# EAGLE board Imprimir (EAGLE 7.6.0)
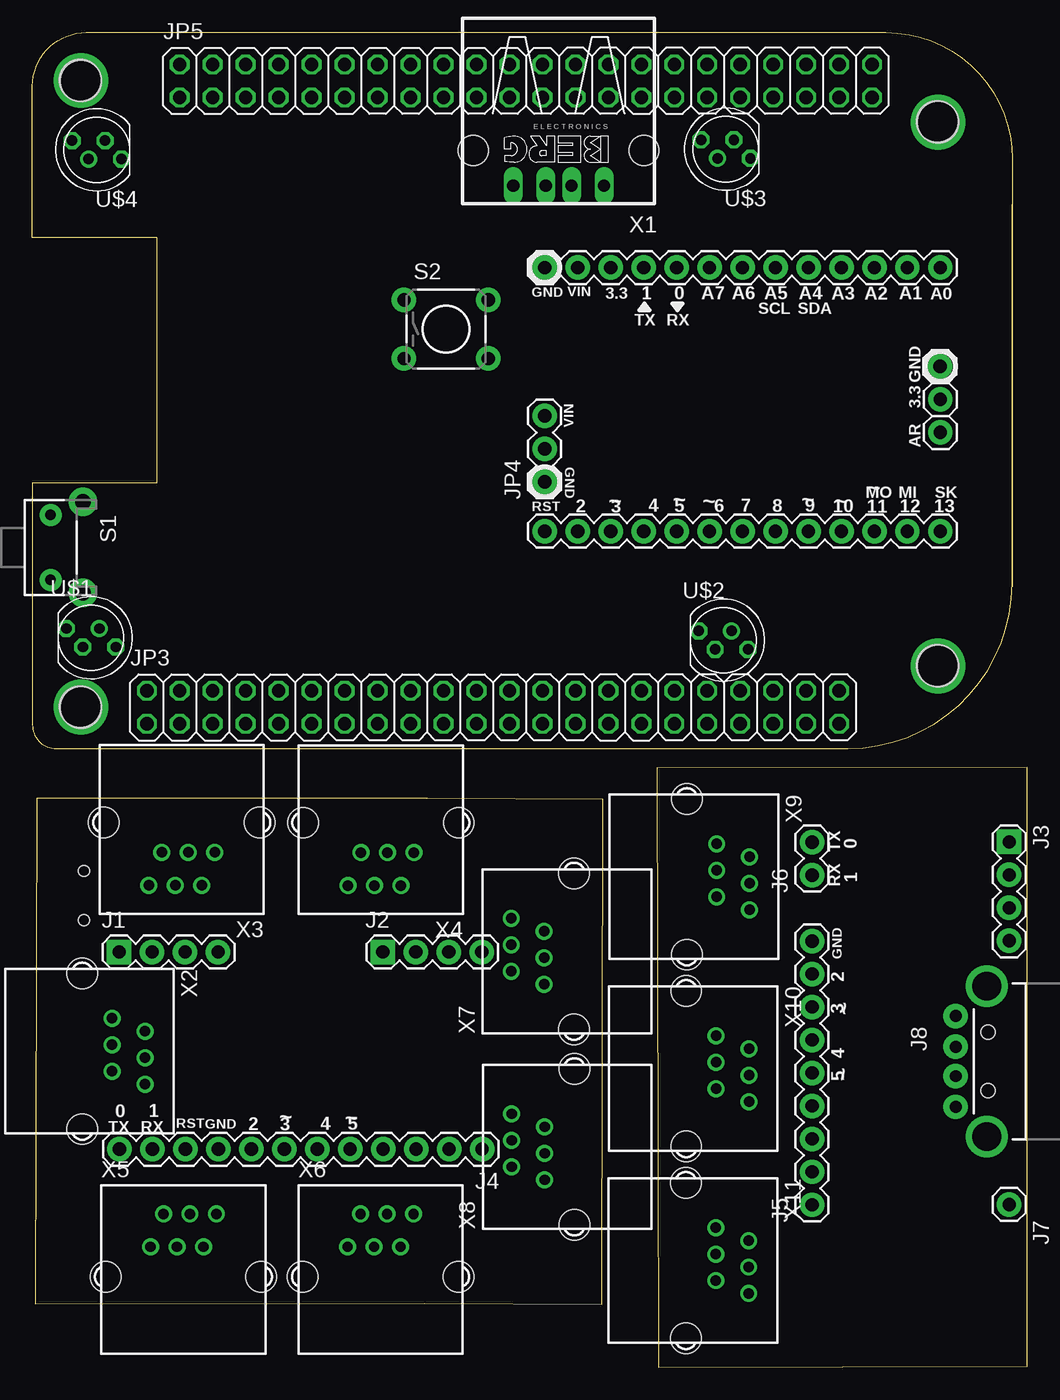
[diagram p0: board, top side]
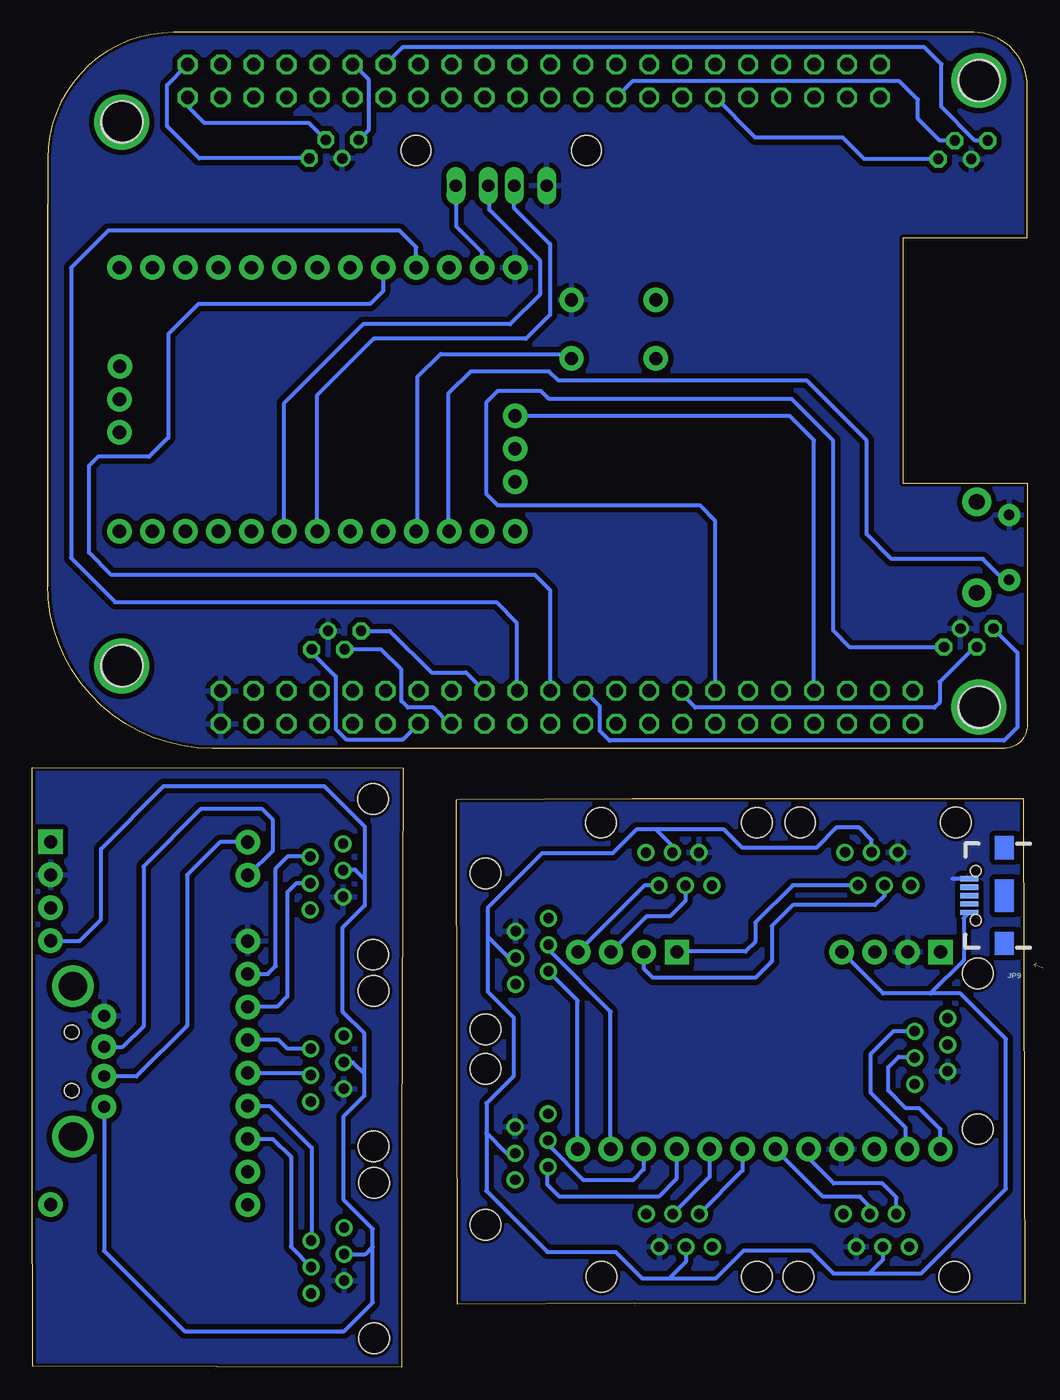
[diagram p1: board, bottom side, seen from below]

Size 76.66 x 102.82 mm. Coordinates in mm from the lower left corner, seen from the top.
Outline: 75.49,89.56 75.49,60.35 arc-90 62.81,47.65 1.83,47.65 arc-90 0,49.48
Outline: 75.49,60.15 75.49,93.09 arc90 65.76,102.82 4.14,102.82 arc90 0,98.68 0,87.02 9.58,87.02 9.58,68.1 0,68.1 0,49.48
Outline: 0,49.48 0,49.45
Outline: 0.2,4.88 30.23,4.93 43.89,4.83 43.97,43.71 30.45,43.79 0.33,43.81 0.2,4.88
Outline: 48.11,46.15 48.21,16.92 48.23,0 76.63,0.08 76.66,15.82 76.66,46.2 48.11,46.15
Copper layers (1*16): Top 0.035mm / dielectric 1.5mm / Bottom 0.035mm
Design rules "ITEADstudio_DRC *": minimum track width 6mil, minimum drill 12mil, track to track 16mil, track to pad 12mil, pad to pad 6mil, via to via 6mil, smd to smd 0mil, copper to edge 10mil, drill to drill 10mil, minimum pad ring 10mil, minimum via ring 6mil, stop-mask expansion 2mil, vias tented up to drill 100mil, thermal gap 15mil
Net classes: 1 power: width 0.381 mm, clearance 0.254 mm
Holes 3.2 mm at 3.68,99.14 3.68,50.88 69.72,54.05 69.72,95.96 3.73,99.09 3.73,50.83 69.77,54 69.77,95.91 3.73,99.09 3.73,50.83 69.77,54 69.77,95.91

## Footprints (pad centres in the part's own frame; a part is rotated, then mirrored left to right if it is on the bottom)
1X01 = drill 1.016 pad 1.88: 1 0,0
1X13 = drill 1.016 pad 1.88: 1 0,0; 2 2.54,0; 3 5.08,0; 4 7.62,0; 5 10.16,0; 6 12.7,0; 7 15.24,0; 8 17.78,0; 9 20.32,0; 10 22.86,0; 11 25.4,0; 12 27.94,0; 13 30.48,0
1X04 = drill 1.016 pad 1.88 square: 1 0,0 | drill 1.016 pad 1.88: 2 2.54,0; 3 5.08,0; 4 7.62,0
1X12 = drill 1.016 pad 1.88: 1 0,0; 2 2.54,0; 3 5.08,0; 4 7.62,0; 5 10.16,0; 6 12.7,0; 7 15.24,0; 8 17.78,0; 9 20.32,0; 10 22.86,0; 11 25.4,0; 12 27.94,0
1X09 = drill 1.016 pad 1.88: 1 0,0; 2 2.54,0; 3 5.08,0; 4 7.62,0; 5 10.16,0; 6 12.7,0; 7 15.24,0; 8 17.78,0; 9 20.32,0
1X02 = drill 1.016 pad 1.88: 1 0,0; 2 2.54,0
USB-A-H = drill 0.914 pad 1.88: D+ 2.4,1.127; D- 2.4,-1.127; GND 2.4,3.5; VBUS 2.4,-3.5 | drill 2.2: GND2 0,-5.8; GND3 0,5.8 | hole 1.1: -0.1,2.25; -0.1,-2.25
2X22 = drill 1.016 octagon: 1 -25.4,-1.27; 2 -25.4,1.27; 3 -22.86,-1.27; 4 -22.86,1.27; 5 -20.32,-1.27; 6 -20.32,1.27; 7 -17.78,-1.27; 8 -17.78,1.27; 9 -15.24,-1.27; 10 -15.24,1.27; 11 -12.7,-1.27; 12 -12.7,1.27; 13 -10.16,-1.27; 14 -10.16,1.27; 15 -7.62,-1.27; 16 -7.62,1.27; 17 -5.08,-1.27; 18 -5.08,1.27; 19 -2.54,-1.27; 20 -2.54,1.27; 21 0,-1.27; 22 0,1.27; 23 2.54,-1.27; 24 2.54,1.27; 25 5.08,-1.27; 26 5.08,1.27; 27 7.62,-1.27; 28 7.62,1.27; 29 10.16,-1.27; 30 10.16,1.27; 31 12.7,-1.27; 32 12.7,1.27; 33 15.24,-1.27; 34 15.24,1.27; 35 17.78,-1.27; 36 17.78,1.27; 37 20.32,-1.27; 38 20.32,1.27; 39 22.86,-1.27; 40 22.86,1.27; 41 25.4,-1.27; 42 25.4,1.27; 43 27.94,-1.27; 44 27.94,1.27
1X03 = drill 1.016 pad 1.88: 1 0,0; 2 2.54,0; 3 5.08,0
USB-AB-MICRO-SMD_V03 = smd 1.4 x 0.4: D+1 2.7,0; D-1 2.7,0.65; GND1 2.7,-1.3; ID1 2.7,-0.65; VBUS1 2.7,1.3 | hole 0.85: 2.2,1.9; 2.2,-1.9
TACTILE-PTH-SIDEEZ = drill 0.8 pad 1.7: 1 -2.5,0; 2 2.5,0 | drill 1.2 pad 2.2: ANCHOR1 -3.5,2.5; ANCHOR2 3.5,2.5
TACTILE-PTH = drill 1.016 pad 1.88: 1 -3.251,2.261; 2 3.251,2.261; 3 -3.251,-2.261; 4 3.251,-2.261
LED5MMRGB = drill 0.8 pad 0.813 octagon: P$1 -1.905,0.714; P$2 -0.635,-0.714; P$4 1.905,-0.714 | drill 0.8 pad 0.813: P$3 0.635,0.714
PN87520 = drill 0.95 long: 1 -3.5,2.71; 2 -1,2.71; 3 1,2.71; 4 3.5,2.71 | hole 2.3: -6.57,0; 6.57,0
YH-55-10 = drill 0.8 pad 1.3: 1 -2.54,2.3; 2 -1.54,4.84; 3 -0.5,2.3; 4 0.5,4.84; 5 1.54,2.3; 6 2.54,4.84 | hole 2.36: -6,0; 6,0

## Placement (x,y rotation side)
+  M01PTH  [1X01]  69.95,74.55 270 top
ANALOGSIDE  M13  [1X13]  69.95,84.71 180 top
DIGITALSIDE  M13  [1X13]  69.95,64.39 180 top
J1  [1X04]  6.68,31.98 0 top
J2  [1X04]  27,31.98 0 top
J3  [1X04]  75.26,40.46 270 top
J4  [1X12]  34.65,16.79 180 top
J5  [1X09]  60.07,12.5 90 top
J6  [1X02]  60.07,37.9 90 top
J7  [1X01]  75.26,12.52 270 top
J8  USB-A-H  [USB-A-H]  73.53,23.55 180 top
JP1  M01PTH  [1X01]  69.95,72.01 0 top
JP2  M01PTH  [1X01]  69.93,77.09 0 top
JP3  [2X22]  34.21,50.83 0 top
JP4  [1X03]  39.47,68.2 90 top
JP5  [2X22]  36.75,99.09 0 top
JP9  Micro USB  [USB-AB-MICRO-SMD_V03]  1.78,36.32 180 bottom
S1  SWITCH-MOMENTARY-2SIDE_EZ  [TACTILE-PTH-SIDEEZ]  1.4,63.14 270 top
S2  [TACTILE-PTH]  31.88,79.96 0 top
U$1  5MMRGBLED  [LED5MMRGB]  4.52,56.18 0 top
U$2  5MMRGBLED  [LED5MMRGB]  53.24,56.01 0 top
U$3  5MMRGBLED  [LED5MMRGB]  53.42,93.83 180 top
U$4  5MMRGBLED  [LED5MMRGB]  4.95,93.78 180 top
X1  [PN87520]  40.54,93.73 180 top
X2  YH-55-10  [YH-55-10]  3.84,24.33 270 top
X3  YH-55-10  [YH-55-10]  11.51,41.96 180 top
X4  YH-55-10  [YH-55-10]  26.85,41.94 180 top
X5  YH-55-10  [YH-55-10]  11.63,6.96 0 top
X6  YH-55-10  [YH-55-10]  26.82,6.96 0 top
X7  YH-55-10  [YH-55-10]  41.73,32.03 90 top
X8  YH-55-10  [YH-55-10]  41.76,16.97 90 top
X9  YH-55-10  [YH-55-10]  50.42,37.77 270 top
X10  YH-55-10  [YH-55-10]  50.37,22.99 270 top
X11  YH-55-10  [YH-55-10]  50.34,8.2 270 top

## Library data of the parts
+ ANALOGSIDE DIGITALSIDE J4-J7 JP1 JP2 JP4 = SparkFun-Connectors
J1-J3 = SparkFun-Connectors; PROD_ID: CONN-09696
J8 = SparkFun-Connectors; PROD_ID: CONN-08367
JP3 JP5 = pinhead
JP9 = SparkFun-Connectors; PROD_ID: CONN-11794
S1 = SparkFun-Electromechanical
S2 = SparkFun-Retired
U$1-U$4 = led_rgb
X1 = con-berg; OC_FARNELL: unknown; OC_NEWARK: unknown
X2-X11 = con-wenzhou-yihua; OC_FARNELL: unknown; OC_NEWARK: unknown

## Nets
AGND [power]: JP4.1
AREF: JP1.1
GND [power]: ANALOGSIDE.13 JP3.43 JP3.44 S1.1 S2.2 U$1.P$3 U$2.P$3 U$3.P$3 U$4.P$3 X1.4
GND1 [power]: J1.2 J4.9 JP9.GND1 X2.5 X3.5 X4.5 X5.5 X6.5 X7.5 X8.5
GND2 [power]: J3.2 J5.9 J8.VBUS X9.5 X10.5 X11.5
N$1: DIGITALSIDE.10 S2.4
N$2: ANALOGSIDE.9 JP3.24
N$3: DIGITALSIDE.9
N$4: ANALOGSIDE.11
N$5: JP3.14 U$1.P$4
N$6: ANALOGSIDE.8
N$7: J4.12 X2.4
N$8: JP3.16 U$1.P$2
N$9: DIGITALSIDE.8
N$10: DIGITALSIDE.11 S1.2
N$11: JP3.22 U$1.P$1
N$12: JP3.28 U$2.P$1
N$13: JP3.29 U$2.P$2
N$14: JP3.31 U$2.P$4
N$15: JP5.11 U$4.P$1
N$16: JP5.17 U$4.P$2
N$17: JP5.32 U$4.P$4
N$19: JP5.43 U$3.P$2
N$20: JP5.44 U$3.P$1
N$21: JP5.34 U$3.P$4
N$22: ANALOGSIDE.10 JP3.26
N$23: DIGITALSIDE.7 X1.3
N$24: ANALOGSIDE.12 X1.1
N$25: DIGITALSIDE.6 X1.2
N$29: J4.11 X2.2
N$30: J4.10
N$31: J4.7 X5.4
N$32: J4.8 X5.2
N$33: J4.5 X6.4
N$34: J4.6 X6.2
N$35: J4.3 X8.4
N$36: J4.4 X8.2
N$37: J4.2 X7.4
N$38: J4.1 X7.2
N$39: J2.4 X4.2
N$40: J2.3 X4.4
N$41: J2.2 X3.4
N$42: J2.1 X3.2
N$43: J5.7 X9.4
N$44: J5.8 X9.2
N$45: J5.5 X10.4
N$46: J5.6 X10.2
N$47: J5.3 X11.4
N$48: J5.4 X11.2
N$49: J5.2
N$50: J5.1
N$51: J7.1
N$52: J6.2 J8.D+
N$53: J6.1 J8.D-
VCC: JP3.8 JP4.3
VIN: J1.4 JP9.VBUS1 X3.3 X4.3 X5.3 X6.3 X7.3 X8.3
VIN1: J3.4 J8.GND X9.3 X10.3 X11.3

## Tracks (layer width: path | path; a pad name or v marks a point on that pad's centre or on a via)
AGND1
  pour Bottom: 0.43,43.76 43.87,43.69 43.99,4.83 0.18,4.85 0.28,33.96
AGND2
  pour Bottom: 76.68,0.48 48.11,0.25 48.13,46.28 76.5,46.18
GND
  pour Bottom: -0.46,102.77 74.93,102.54 75.39,47.24 -0.25,47.47
GND1
  Bottom 0.305: JP9.GND1 5.77,37.62
  pour Bottom: 0.33,43.71 43.87,43.69 43.99,4.85 0.13,4.9
GND2
  pour Bottom: 76.5,46.18 76.61,0.43 48.16,0.13 48.08,46.2
N$1
  Bottom 0.305: DIGITALSIDE.10 47.02,64.47 47.02,76.25 45.21,78.05 35.48,78.05 S2.4
N$2
  Bottom 0.305: ANALOGSIDE.9 49.63,82.91 50.65,81.89 63.88,81.89 66.19,79.58 66.19,71.6 67.67,70.13 71.6,70.13 72.29,69.44 72.29,62.74 70.59,61.04 37.95,61.04 36.75,59.84 JP3.24
N$5
  Bottom 0.305: U$1.P$4 6.45,55.45 13.67,55.45 14.96,56.74 14.96,71.37 18.16,74.57 36.86,74.57 37.47,75.18 40.82,75.18 41.71,74.29 41.71,67.28 40.82,66.4 25.25,66.4 24.08,65.23 24.08,52.12 JP3.14
N$7
  Bottom 0.305: J4.12 6.71,18.31 8.33,19.94 9.35,19.94 10.72,21.31 10.72,23.09 9.91,23.9 8.74,23.9 X2.4
N$8
  Bottom 0.305: U$1.P$2 4.07,55.47 6.76,52.78 6.76,51.21 7.16,50.8 25.58,50.8 26.59,51.82 JP3.16
N$10
  Bottom 0.305: S1.2 1.82,60.64 3.43,62.26 10.46,62.26 12.37,64.16 12.37,71.37 16.99,76 36.14,76 36.86,76.71 42.9,76.71 44.63,74.98 44.63,64.47 DIGITALSIDE.11
N$11
  Bottom 0.305: U$1.P$1 0.76,55.04 0.76,49.28 1.78,48.26 32.18,48.26 32.94,49.02 32.94,50.9 34.14,52.1 JP3.22
N$12
  Bottom 0.305: U$2.P$1 49.13,56.72 45.92,53.52 43.26,53.52 JP3.28
N$13
  Bottom 0.305: 44.53,49.56 45.77,50.8 47.73,50.8 48.23,51.31 48.23,53.72 49.81,55.3 U$2.P$2
  Bottom 0.406: JP3.29 44.53,49.56 | U$2.P$2
N$14
  Bottom 0.305: 55.14,55.07 53.29,53.21 53.29,49.15 52.5,48.36 48.11,48.36 JP3.31
  Bottom 0.406: U$2.P$4 55.14,55.07
N$15
  Bottom 0.305: U$4.P$1 12.57,93.06 14.22,94.72 20.96,94.72 JP5.11
N$16
  Bottom 0.305: U$4.P$2 6.76,94.49 8.43,96.16 8.43,97.64 9.86,99.06 30.43,99.06 JP5.17
N$17
  Bottom 0.305: U$4.P$4 4.04,94.49 6.63,97.08 6.63,100.38 7.92,101.68 48.13,101.68 JP5.32
N$18  (via drill 3.2)
  other vias: 3.73,99.11
N$19
  Bottom 0.305: U$3.P$2 55.34,95.83 63.4,95.83 64.69,97.13 JP5.43
N$20
  Bottom 0.305: U$3.P$1 63.8,93.11 66.29,95.61 66.29,98.76 JP5.44
N$21
  Bottom 0.305: U$3.P$4 50.72,95.33 50.72,99.16 51.92,100.36
  Bottom 0.406: 51.92,100.36 JP5.34
N$22
  Bottom 0.305: ANALOGSIDE.10 47.09,86.26 48.39,87.55 70.82,87.55 73.69,84.68 73.69,62.33 70.28,58.93 40.92,58.93 39.34,57.35 39.34,52.15 JP3.26
N$23
  Bottom 0.305: DIGITALSIDE.7 54.71,74.88 50.37,79.22 38.63,79.22 36.78,81.08 36.78,86.51 39.55,89.28 X1.3
N$24
  Bottom 0.305: ANALOGSIDE.12 42.01,85.88 43.99,87.86 43.99,90.97 X1.1
N$25
  Bottom 0.305: DIGITALSIDE.6 57.25,74.27 51.18,80.34 39.85,80.34 37.57,82.63 37.57,85.27 41.45,89.15 41.45,90.35 41.4,90.4 41.4,90.88 X1.2
N$26  (via drill 3.2)
  other vias: 3.73,50.85
N$27  (via drill 3.2)
  other vias: 69.77,54
N$28  (via drill 3.2)
  other vias: 69.77,95.91
N$29
  Bottom 0.305: X2.2 10.32,25.87 12.09,24.1 12.09,21.16 9.4,18.47 9.4,16.94 J4.11
N$31
  Bottom 0.305: X5.4 12.13,12.36 12.9,13.13 15.75,13.13 J4.7
N$32
  Bottom 0.305: X5.2 10.09,13.06 11.18,14.15 14.91,14.15 17.02,16.26 17.02,16.64 J4.8
N$33
  Bottom 0.305: J4.5 24.49,14.64 X6.4
N$34
  Bottom 0.305: J4.6 21.95,15.14 X6.2
N$35
  Bottom 0.305: J4.3 29.57,15.21 30.38,14.4 34.19,14.4 36.75,16.97 36.75,17.3 X8.4
N$36
  Bottom 0.305: J4.4 27.03,14.5 28.4,13.13 36.07,13.13 36.98,14.05 36.98,15.36 X8.2
N$37
  Bottom 0.305: J4.2 32.11,27.38 36.75,32.03 36.75,32.39 X7.4
N$38
  Bottom 0.305: J4.1 34.65,28.24 X7.2
N$39
  Bottom 0.305: X4.2 29.5,37.1 J2.4
N$40
  Bottom 0.305: X4.4 26.35,35.91 27.53,34.72 29.34,34.72 J2.3
N$41
  Bottom 0.305: X3.4 11.01,36.31 11.73,35.59 18.08,35.59 19.69,33.99 19.69,31.27 20.96,30 28.85,30 29.54,30.68 J2.2
N$42
  Bottom 0.305: X3.2 18.07,37.12 20.96,34.24 20.96,32.77 21.72,32 26.97,32 J2.1
N$43
  Bottom 0.305: X9.4 56.33,37.27 57.02,36.58 57.02,28.55 57.81,27.76 60.05,27.76 J5.7
N$44
  Bottom 0.305: J5.8 58.52,30.28 57.91,30.89 57.91,38.43 56.97,39.37 55.32,39.37 X9.2
N$45
  Bottom 0.305: J5.5 55.38,22.66 X10.4
N$46
  Bottom 0.305: X10.2 57.01,24.53 57.71,25.22 60.05,25.22 J5.6
N$47
  Bottom 0.305: J5.3 58.14,17.58 56.74,16.18 56.74,9.26 X11.4
N$48
  Bottom 0.305: J5.4 58.37,20.12 55.14,16.89 55.14,9.78 X11.2
N$52
  Bottom 0.305: J6.2 62.2,40.44 64.74,37.9 64.74,26.29 68.66,22.38 68.7,22.42 J8.D+
N$53
  Bottom 0.305: J6.1 60.02,37.9 58.12,39.8 58.12,42.14 58.95,42.98 63.68,42.98 68.1,38.56 68.1,26.26 69.69,24.67 J8.D-
VCC
  Bottom 0.305: 39.45,73.25 JP4.3 18.31,73.28 16.43,71.4 JP3.8
VIN
  Bottom 0.305: X3.3 12.01,40.61 12.95,41.55 14.71,41.55 16.26,40 21.97,40 23.37,41.4 28.6,41.4 | 28.6,41.4 30.12,41.4 31.95,39.57 37.39,39.57 41.58,35.38 41.58,33.17 | 41.58,33.17 41.58,28.93 39.6,26.95 39.6,22.4 41.68,20.32 41.68,18.03 | 41.68,18.03 41.68,13.56 36.98,8.86 31.72,8.86 29.69,6.83 27.58,6.83 | 27.58,6.83 24,6.83 21.84,8.99 16.71,8.99 14.94,7.21 12.19,7.21 | 12.19,7.21 8.18,7.21 1.65,13.74 1.65,25.27 5.16,28.78 7.47,28.78 | 7.47,28.78 11.1,28.78 J1.4 | X5.3 11.13,8.27 12.19,7.21 | X6.3 26.32,8.09 27.58,6.83 | X8.3 40.11,16.47 41.68,18.03 | X7.3 39.94,31.53 41.58,33.17 | X4.3 27.35,40.15 28.6,41.4 | JP9.VBUS1 4.9,34.6 4.9,31.34 7.47,28.78
VIN1
  Bottom 0.305: X11.3 50.99,8.7 50.44,9.25 | 51.08,22.58 51.08,20.93 52.68,19.33 52.68,12.88 50.44,10.64 50.44,9.25 | 51.08,22.58 51.08,25.7 52.76,27.38 52.76,33.86 51.05,35.56 51.05,37.57 | X9.3 52.69,38.3 51.79,38.3 51.05,37.57 | X10.3 51.99,23.49 51.08,22.58 | J3.4 73.03,32.84 71.37,34.49 71.37,39.93 66.55,44.75 54.18,44.75 51.05,41.63 51.05,37.57 | J8.GND 71.13,8.95 64.95,2.77 52.63,2.77 50.44,4.95 50.44,9.25

## Text on the board
_tsilk: GND | VIN | 3.3 | 1 | 0 | A7 | A6 | A5 | A4 | A3 | A2 | A1 | A0 | TX | RX | SCL | SDA | GND | 3.3 | VIN | AR | GND | 2 | 3 | 4 | 5 | 6 | 7 | 8 | 9 | 10 | MO | ~ | 11 | MI | 12 | SK | 13 | RST | ~ | ~ | ~ | ~ | ~ | TX | 0 | RX | 1 | GND | 2 | ~ | 3 | 4 | ~ | 5 | 0 | 1 | TX | RX | 2 | ~ | 3 | 4 | ~ | 5 | RST | GND